# EAGLE board touch (EAGLE 7.3.0)
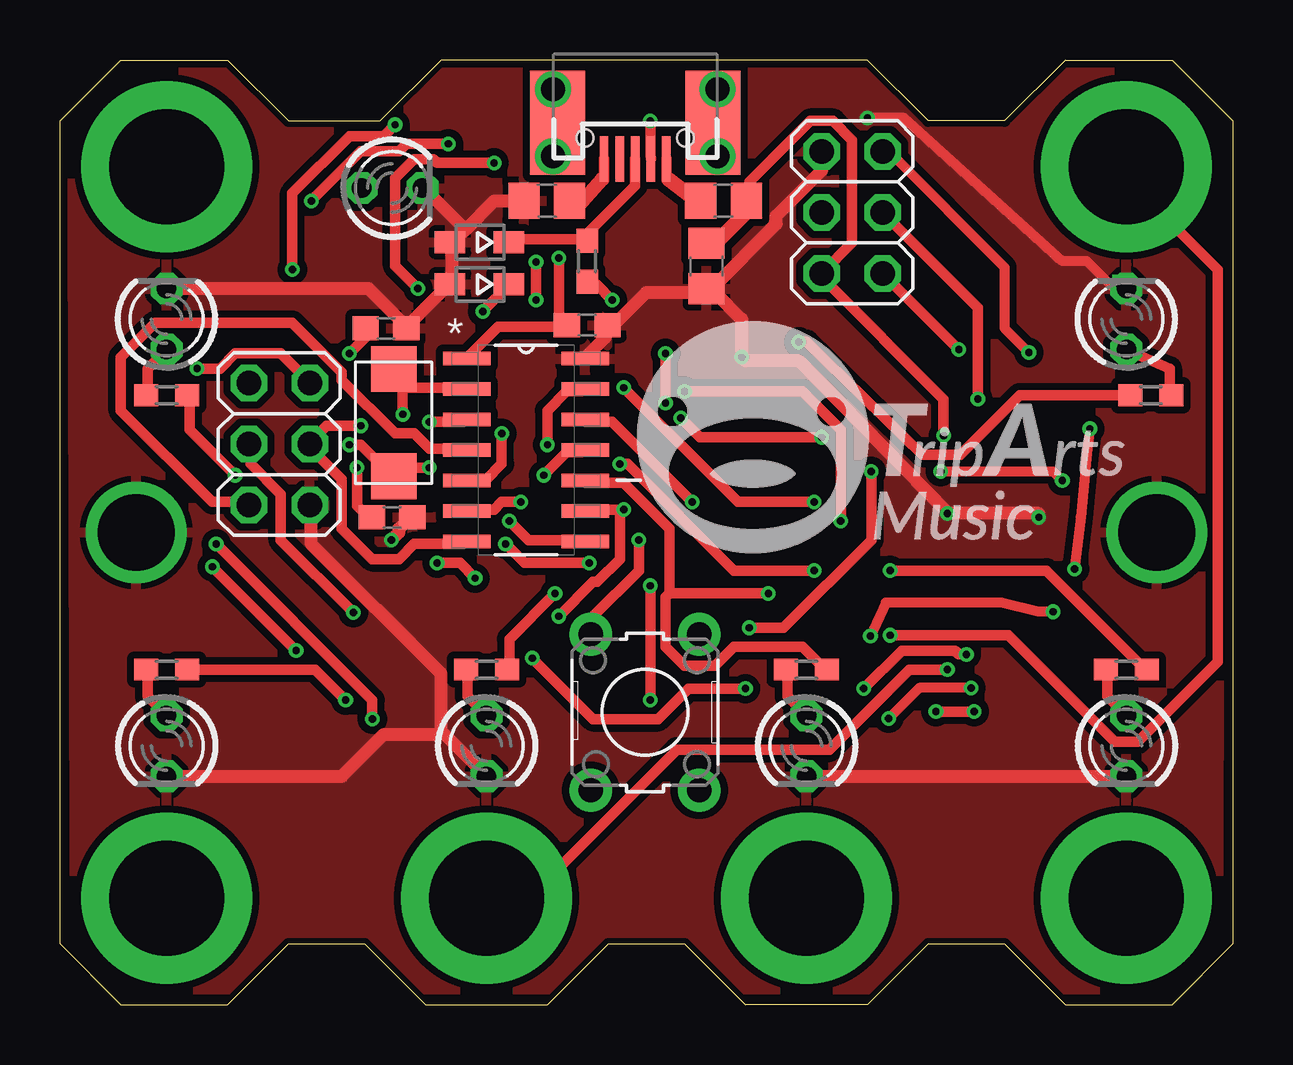
[diagram p0: board, top side]
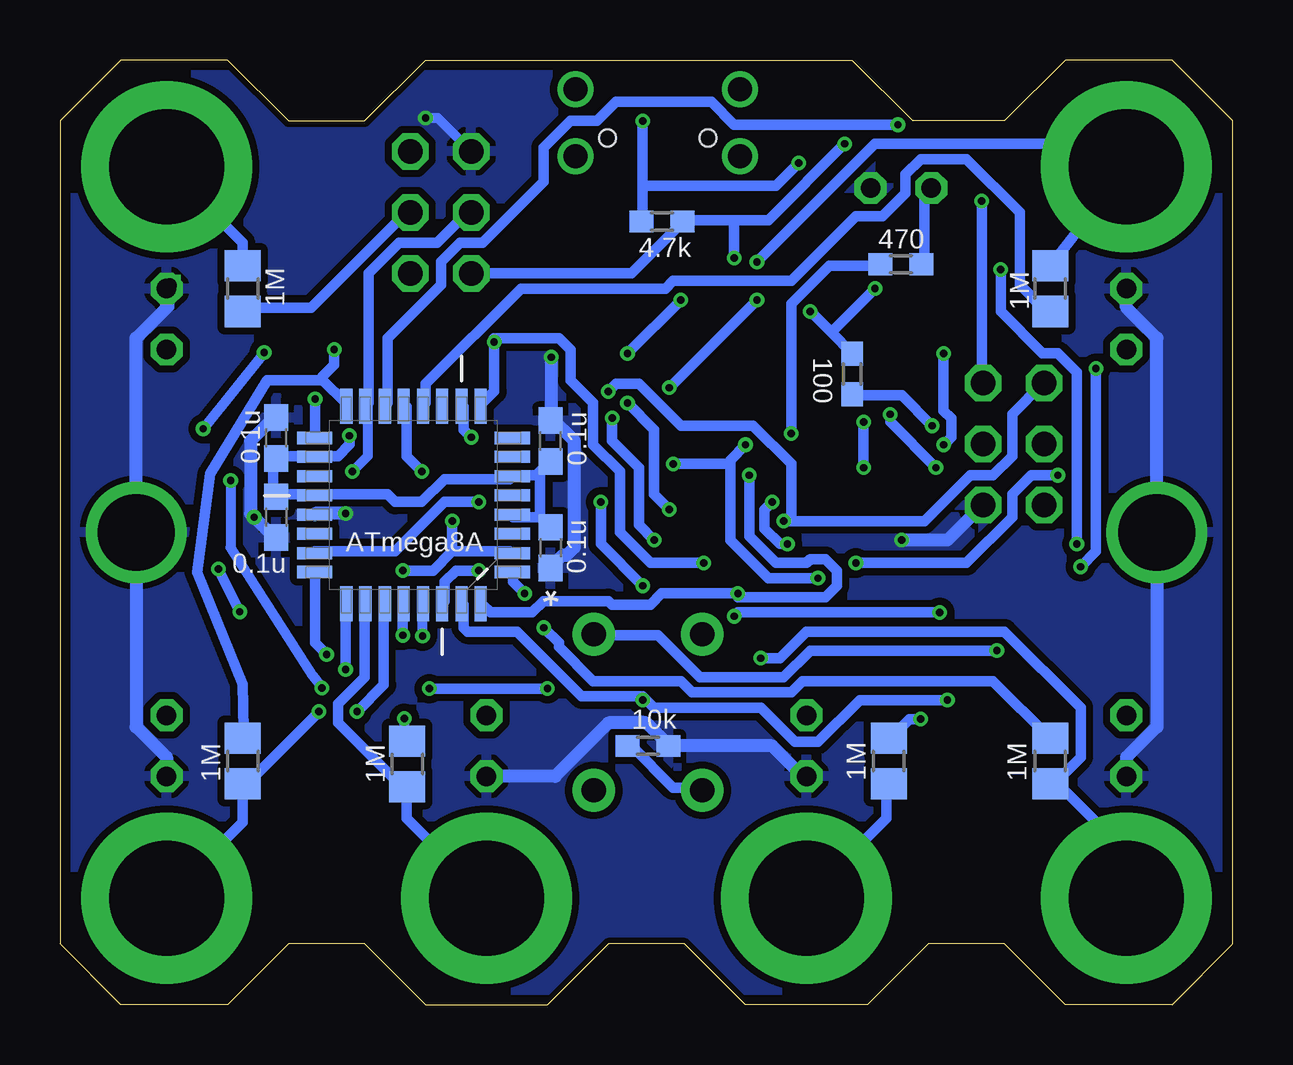
[diagram p1: board, bottom side, seen from below]

Size 48.9 x 39.37 mm. Coordinates in mm from the lower left corner, seen from the top.
Outline: 41.91,0 46.35,0 48.9,2.54 48.9,36.83 46.35,39.37 41.91,39.37 39.37,36.83 36.2,36.83 33.66,39.37 15.88,39.37 13.34,36.83 9.53,36.83 6.99,39.37 2.54,39.37 0,36.83 0,2.54 2.54,0 6.99,0 9.53,2.54 12.7,2.54 15.24,0 20.32,0 22.86,2.54 26.04,2.54 28.57,0 33.66,0 36.2,2.54 39.37,2.54 41.91,0
Copper layers (1*16): Top 0.035mm / dielectric 1.5mm / Bottom 0.035mm
Design rules "Elecrow_2-layer_eagle_rule": minimum track width 6mil, minimum drill 12mil, track to track 6mil, track to pad 6mil, pad to pad 6mil, via to via 6mil, smd to smd 0mil, copper to edge 10mil, drill to drill 10mil, minimum pad ring 10mil, minimum via ring 6mil, stop-mask expansion 2mil, vias tented up to drill 100mil, thermal gap 10mil
Net classes: 0 default: width 0.432 mm, clearance 0.305 mm; 1 power: width 0.533 mm, clearance 0.305 mm; 2 D+: width 0.381 mm, clearance 0.203 mm; 3 D-: width 0.381 mm, clearance 0.203 mm; 4 GND1: width 0.381 mm, clearance 0.203 mm; 5 VBUS: width 0.381 mm, clearance 0.203 mm

## Footprints (pad centres in the part's own frame; a part is rotated, then mirrored left to right if it is on the bottom)
C0603 = smd 1.1 x 1: 1 -0.85,0; 2 0.85,0
C0805 = smd 1.3 x 1.5: 1 -0.95,0; 2 0.95,0
2X03 = drill 1.016 octagon: 1 -2.54,-1.27; 2 -2.54,1.27; 3 0,-1.27; 4 0,1.27; 5 2.54,-1.27; 6 2.54,1.27
1X01 = drill 3.2 pad 3.81: 1 0,0
USB-MICROB = smd 0.35 x 1.9: D+ 0,2.904; D- -0.65,2.904; GND 1.3,2.904; ID 0.65,2.904; VBUS -1.3,2.904 | smd 2.286 x 4.318: MT1 3.239,1.397; MT3 -3.238,1.397 | drill 1: P$2 -3.429,2.794; P$4 -3.429,0; P$5 3.429,2.794; P$6 3.429,0 | hole 0.7: -2.095,2.032; 2.095,2.032
1X01-LARGE = drill 4.8 pad 7.112: 1 0,0
LED3MM = drill 0.813 octagon: A -1.27,0; K 1.27,0
MC-405 = smd 1.905 x 1.905: 1 0.305,1.575; 2 4.775,1.575
R0603 = smd 1 x 0.9: 1 -0.85,0; 2 0.85,0
R0805 = smd 1.3 x 1.5: 1 -0.95,0; 2 0.95,0
B3F-10XX = drill 1.016 pad 1.778: 1 -3.251,2.261; 2 3.251,2.261; 3 -3.251,-2.261; 4 3.251,-2.261
SOIC127P600X175-14N = smd 1.981 x 0.559: 1 -2.464,3.81; 2 -2.464,2.54; 3 -2.464,1.27; 4 -2.464,0; 5 -2.464,-1.27; 6 -2.464,-2.54; 7 -2.464,-3.81; 8 2.464,-3.81; 9 2.464,-2.54; 10 2.464,-1.27; 11 2.464,0; 12 2.464,1.27; 13 2.464,2.54; 14 2.464,3.81
QFP80P900X900X120-32N = smd 1.473 x 0.508: 1 -4.115,2.794; 2 -4.115,2.007; 3 -4.115,1.194; 4 -4.115,0.406; 5 -4.115,-0.406; 6 -4.115,-1.194; 7 -4.115,-2.007; 8 -4.115,-2.794; 17 4.115,-2.794; 18 4.115,-2.007; 19 4.115,-1.194; 20 4.115,-0.406; 21 4.115,0.406; 22 4.115,1.194; 23 4.115,2.007; 24 4.115,2.794 | smd 0.508 x 1.473: 9 -2.794,-4.115; 10 -2.007,-4.115; 11 -1.194,-4.115; 12 -0.406,-4.115; 13 0.406,-4.115; 14 1.194,-4.115; 15 2.007,-4.115; 16 2.794,-4.115; 25 2.794,4.115; 26 2.007,4.115; 27 1.194,4.115; 28 0.406,4.115; 29 -0.406,4.115; 30 -1.194,4.115; 31 -2.007,4.115; 32 -2.794,4.115
SOD323-W = smd 1.27 x 0.914: A 1.25,0; C -1.2,0

## Placement (x,y rotation side)
C1  0.1u  [C0603]  21.97,28.32 0 top
C2  22p  [C0603]  13.84,20.32 180 top
C3  22p  [C0603]  13.59,28.19 180 top
C4  22u  [C0805]  26.95,30.78 270 top
C5  0.1u  [C0603]  28.45,23.5 90 bottom
C6  0.1u  [C0603]  28.45,19.05 270 bottom
C7  0.1u  [C0603]  39.88,20.32 270 bottom
C8  0.1u  [C0603]  39.88,23.62 90 bottom
ID1  [C0805]  27.66,33.5 180 top
ID2  [C0805]  20.29,33.5 0 top
JP1  [2X03]  33.02,33.02 90 top
JP2  [2X03]  9.14,23.37 270 top
JP3  [1X01]  3.17,19.68 0 top
JP4  USB-MICROB  [USB-MICROB]  23.98,38.15 180 top
JP5  [1X01]  45.72,19.68 0 top
JP11  [1X01-LARGE]  4.45,34.92 180 top
JP12  [1X01-LARGE]  4.45,4.45 180 top
JP13  [1X01-LARGE]  17.78,4.45 180 top
JP14  [1X01-LARGE]  31.11,4.45 180 top
JP15  [1X01-LARGE]  44.45,4.45 180 top
JP16  [1X01-LARGE]  44.45,34.92 180 top
LED1  3m-red  [LED3MM]  13.84,34.04 0 top
LED2  [LED3MM]  4.45,28.57 90 top
LED3  [LED3MM]  4.45,10.79 270 top
LED4  [LED3MM]  17.78,10.79 270 top
LED5  [LED3MM]  31.11,10.79 270 top
LED6  [LED3MM]  44.45,10.79 270 top
LED7  [LED3MM]  44.45,28.57 90 top
Q1  MC-405  [MC-405]  15.49,21.72 90 top
R1  75  [R0603]  15.88,26.29 90 bottom
R2  75  [R0603]  21.97,30.99 90 top
R3  1.5k  [R0603]  23.8,32.64 0 bottom
R4  470  [R0603]  13.84,30.86 180 bottom
R5  [R0805]  7.62,29.84 270 bottom
R6  [R0805]  7.62,10.16 90 bottom
R7  [R0805]  14.35,10.16 90 bottom
R8  [R0805]  34.42,10.03 90 bottom
R9  [R0805]  41.27,10.16 90 bottom
R10  [R0805]  41.27,29.84 270 bottom
R11  470  [R0603]  4.45,25.4 0 top
R12  470  [R0603]  4.45,13.97 0 top
R13  470  [R0603]  17.78,13.97 0 top
R14  470  [R0603]  31.11,13.97 0 top
R15  470  [R0603]  44.45,13.97 0 top
R16  470  [R0603]  45.47,25.4 180 top
R17  75  [R0603]  24.38,10.79 180 bottom
S1  [B3F-10XX]  24.38,12.19 270 top
U2  ATTINY44-20SSU  [SOIC127P600X175-14N]  19.43,23.11 0 top
U3  ATMEGA8A-AU  [QFP80P900X900X120-32N]  34.16,20.83 180 bottom
U$1  LOGOSMALL  [LOGO-SMALL]  24.05,18.82 0 top
ZD1  3.6V  [SOD323-W]  17.5,31.78 180 top
ZD2  3.6V  [SOD323-W]  17.5,30.02 180 top

## Library data of the parts
C1-C8 ID1 ID2 JP3 JP5 JP11-JP16 R1-R17 U$1 ZD1 ZD2 = 0my
JP1 JP2 = pinhead
JP4 = 0my; PROD_ID: CONN-09505
LED1-LED7 = led
Q1 = 0my; OC_FARNELL: unknown; OC_NEWARK: unknown
S1 = 0my; MPN: B3F-1000; OC_FARNELL: 176432; OC_NEWARK: 36M3542
U2 = Atmel_By_element14_Batch_1-00; MPN: ATTINY44-20SSU; OC_FARNELL: 1455152; OC_NEWARK: 58M3787; PACKAGE: SOIC-14; SUPPLIER: Atmel
U3 = 0my; MPN: ATMEGA8A-AU; OC_FARNELL: 1748532; OC_NEWARK: 26R5638; PACKAGE: TQFP-32; SUPPLIER: Atmel

## Nets
+5V: C1.1 C4.1 C5.1 C6.1 C7.1 C8.1 ID1.1 JP1.2 JP2.2 R3.2 S1.1 U2.1 U3.4 U3.6 U3.18 U3.20
D+: JP4.D+ R2.2 ZD1.C
D-: JP4.D- R1.2 R3.1 ZD2.C
GND [power]: C1.2 C2.1 C3.1 C4.2 C5.2 C6.2 C7.2 C8.2 ID2.1 JP1.6 JP2.6 JP3.1 JP5.1 LED1.K LED2.K LED3.K LED4.K LED5.K LED6.K LED7.K R17.1 U2.14 U3.21 ZD1.A ZD2.A
GND1: ID2.2 JP4.GND
N$1: R5.2 U3.12
N$3: R4.2 U2.5
N$5: C2.2 Q1.2 U2.2
N$6: C3.2 Q1.1 U2.3
N$7: R11.2 U2.13 U3.30
N$8: LED1.A R4.1
N$9: R12.2 U2.12 U3.31
N$10: R14.2 U2.10 U3.1
N$11: JP11.1 R5.1 U3.23
N$12: JP2.5 U2.4
N$13: R13.2 U2.11 U3.32
N$14: JP2.4 R1.1 U2.7
N$15: R6.2 U3.13
N$17: R17.2 S1.4
N$19: R7.2 U3.14
N$20: JP1.4 R8.2 U3.15
N$21: JP1.5 U3.29
N$22: JP1.1 R9.2 U3.16
N$23: JP1.3 R10.2 U3.17
N$24: LED7.A R16.1
N$25: LED6.A R15.1
N$26: LED5.A R14.1
N$27: LED4.A R13.1
N$28: LED3.A R12.1
N$29: LED2.A R11.1
N$30: R16.2 U2.6 U3.9
N$31: JP12.1 R6.1 U3.24
N$32: JP13.1 R7.1 U3.25
N$33: JP14.1 R8.1 U3.26
N$34: JP15.1 R9.1 U3.27
N$35: JP16.1 R10.1 U3.28
N$36: S1.3 U3.10
N$37: JP2.3 R2.1 U2.9
N$39: JP2.1 R15.2 U2.8 U3.2
VBUS: ID1.2 JP4.VBUS

## Tracks (layer width: path | path; a pad name or v marks a point on that pad's centre or on a via)
+5V  (via drill 0.3)
  Top 0.432: U2.1 16.99,26.99 18.26,28.26 21.11,28.26 C1.1 20.8,28.42 v20.8,31.11 | 27.14,31.55 C4.1 | 28.89,33.29 ID1.1 28.73,33.66 28.73,34.29 31.27,36.83 32.23,36.83 33.02,36.04 33.02,31.75 JP1.2 31.75,30.32 36.83,25.24 v36.83,23.72 | v10.48,33.5 12.54,35.56 14.13,35.56 14.45,35.88 v16.19,35.88 | v6.35,18.26 v9.84,14.76 | v5.71,26.51 6.67,26.51 7.3,27.15 9.21,27.15 10.32,26.04 JP2.2
  Top 0.61: 28.89,33.29 27.14,31.55
  Bottom 0.432: 28.89,20.32 28.57,20 C6.1 | 28.89,20.32 30,20.32 U3.4 | 28.97,22.15 29.05,22.07 30,22.07 U3.6 30.16,21.91 32.86,21.91 33.81,20.95 34.92,20.95 35.24,21.27 38.1,21.27 U3.20 38.42,21.27 39.69,21.27 C7.1 40.01,21.27 40.01,22.7 C8.1 39.69,22.86 38.42,22.86 U3.18 38.1,22.86 37.31,22.86 36.83,23.37 v36.83,23.72 | 28.97,22.15 28.57,22.54 C5.1 | 28.89,20.32 28.89,22.07 28.97,22.15 | JP1.2 25.08,30.48 23.02,32.54 R3.2 22.86,32.7 20.8,32.7 | v10.48,33.5 10.48,26.04 JP2.2 | v16.19,35.88 19.37,32.7 20.8,32.7 | 20.8,32.7 v20.8,31.11 | v9.84,14.76 17.62,14.76 18.73,13.65 22.23,13.65 23.97,15.4 26.51,15.4 S1.1 | v6.35,18.26 5.71,18.89 v5.71,26.51
D+
  Top 0.432: ZD1.C 18.73,31.91 21.91,31.91 R2.2 21.91,32.07 23.97,34.13 JP4.D+
D-  (via drill 0.3)
  Top 0.432: v24.61,36.83 24.61,35.4 JP4.D- | v17.62,28.89 18.73,30 ZD2.C | v18.1,35.08 15.72,35.08 15.56,35.24 14.76,35.24 13.97,34.45 13.97,30.8 v14.92,29.84
  Bottom 0.432: v24.61,36.83 24.61,34.13 | 24.61,34.13 24.61,32.7 R3.1 | v17.62,28.89 16.75,28.02 | 16.75,28.02 R1.2 | 24.61,34.13 19.05,34.13 v18.1,35.08 | 16.75,28.02 v14.92,29.84
GND  (via drill 0.3, 0.6)
  Top 0.406: v44.32,29.97 43.81,29.97 42.8,30.99 41.78,30.99 35.18,36.96 v33.66,36.96
  Top 0.533: U2.14 21.91,26.99 22.7,27.78 22.7,28.26 C1.2 23.02,28.26 24.45,29.69 26.83,29.69 C4.2 | JP1.6 31.75,34.77 29.84,32.86 29.84,32.54 27.15,29.84 C4.2 | C4.2 27.3,29.69 28.42,28.57 v28.42,26.99 28.57,26.83 30.8,26.83 36.99,20.51 v36.99,20.48 40.8,20.48 v40.8,20.32 | v13.81,19.37 14.13,19.68 14.13,19.84 14.61,20.32 C2.1 | 15.88,11.43 15.88,13.81 10.48,19.21 10.48,20.8 JP2.6 | LED4.K 15.88,11.43 | 16.91,32.31 16.51,31.91 ZD1.A 16.35,31.75 16.35,30.16 ZD2.A 16.19,30 14.45,28.26 C3.1 14.29,28.42 12.86,29.84 LED2.K | 16.91,32.31 18.1,33.5 19.21,33.5 ID2.1 | 16.91,32.31 15.24,33.97 LED1.K | LED3.K 11.75,9.53 13.49,11.27 15.72,11.27 15.88,11.43 | LED5.K LED6.K
  Bottom 0.406: JP5.1 45.72,27.69 44.32,29.08 v44.32,29.97 | v33.66,36.96 33.15,36.96 JP1.6
  Bottom 0.533: C6.2 28.42,18.26 27.94,18.73 27.78,18.73 27.46,19.05 27.46,23.5 28.42,24.45 C5.2 28.42,24.61 v28.42,26.99 | C7.2 40.01,19.53 v40.8,20.32 40.96,20.48 40.96,23.5 40.01,24.45 C8.2 | v36.99,20.48 38.26,20.48 U3.21 | LED6.K 44.45,10.32 45.72,11.59 JP5.1 45.72,27.78 44.45,29.05 LED7.K | v13.81,19.37 11.91,19.37 10.48,20.8 JP2.6 | LED4.K 17.94,9.53 19.21,10.79 R17.1 23.65,10.95 24.45,11.75 26.04,11.75 28.26,9.53 LED5.K | LED3.K 4.45,10.32 3.17,11.59 JP3.1 3.17,27.78 4.45,29.05 LED2.K
  pour Bottom: 0.64,38.73 48.26,38.73 48.26,0.64 0.64,0.64
  pour Top: 0.51,38.86 48.39,38.86 48.26,0.64 0.64,0.64
GND1
  Top 0.432: 21.59,33.27 21.27,33.66 ID2.2 | 22.59,34.4 22.67,34.35 JP4.GND
  Top 0.61: 22.59,34.4 21.59,33.27
N$1
  Bottom 0.432: U3.12 33.66,25.08 33.66,25.88 29.69,29.84 23.65,29.84 23.34,30.16 18.41,30.16 15.72,32.86 14.61,32.86 13.65,33.81 13.65,34.61 13.02,35.24 11.11,35.24 8.89,33.02 8.89,30 7.94,29.05 7.62,29.05 R5.2
N$3  (via drill 0.3)
  Top 0.432: v18.41,23.81 18.41,22.54 17.78,21.91 16.99,21.91 U2.5
  Bottom 0.432: v18.41,23.81 18.41,29.21 16.83,30.8 14.76,30.8 R4.2
N$5  (via drill 0.3)
  Top 0.432: v12.38,22.38 12.38,20.8 12.86,20.32 C2.2 | v14.29,24.61 14.29,26.04 13.97,26.35 Q1.2 14.45,25.72 16.83,25.72 U2.2
  Bottom 0.432: v12.38,22.38 14.29,24.29 v14.29,24.61
N$6  (via drill 0.3)
  Top 0.432: v12.06,27.15 12.7,27.78 12.7,28.1 C3.2 | v12.06,23.34 12.54,23.34 13.81,22.07 Q1.1 14.13,22.07 14.45,22.38 v15.4,22.38 | v15.4,24.29 16.83,24.29 U2.3
  Bottom 0.432: v12.06,27.15 12.06,24.77 11.75,24.45 11.75,23.65 v12.06,23.34 | v15.4,22.38 v15.4,24.29
N$7  (via drill 0.3)
  Top 0.432: v7.3,22.07 5.4,23.97 5.4,25.4 R11.2 | v15.72,18.41 16.67,18.41 v17.3,17.78 | v20.32,23.34 20.32,24.77 21.11,25.56 21.75,25.56 U2.13 | v31.43,18.1 28.1,18.1 23.65,22.54 v23.34,22.54
  Bottom 0.432: v7.3,22.07 8.41,22.07 9.21,21.27 9.21,20.32 11.11,18.41 v15.72,18.41 | v17.3,17.78 19.37,17.78 20.95,19.37 20.95,22.54 | 20.95,22.54 20.95,22.7 v20.32,23.34 | v31.43,18.1 32.38,18.1 32.86,17.62 32.86,16.83 U3.30 | 20.95,22.54 v23.34,22.54
N$8
  Bottom 0.432: R4.1 12.86,30.96 12.86,33.81 12.7,33.97 LED1.A
N$9  (via drill 0.3)
  Top 0.432: R12.2 10.64,13.97 v11.91,12.7 | v26.35,20.95 23.02,24.29 21.91,24.29 U2.12 | v24.61,12.7 v24.61,17.46
  Bottom 0.432: v11.91,12.7 15.56,12.7 17.3,10.95 18.26,10.95 19.68,12.38 24.13,12.38 24.53,12.78 | 24.53,12.78 24.61,12.86 27.15,12.86 29.84,15.56 31.91,15.56 32.07,15.72 32.07,16.67 U3.31 | v26.35,20.95 26.35,19.21 v24.61,17.46 | v24.61,12.7 24.53,12.78
N$10  (via drill 0.3)
  Top 0.432: 25.4,17.14 25.24,16.99 25.24,14.92 26.04,14.13 27.3,14.13 28.1,14.92 30.96,14.92 31.91,13.97 R14.2 | 25.4,17.14 25.4,19.84 23.5,21.75 21.91,21.75 U2.10 | 25.4,17.14 v29.53,17.14
  Bottom 0.432: v29.53,17.14 30,17.62 30,17.94 U3.1
N$11  (via drill 0.3)
  Top 0.432: v31.43,20.95 28.26,20.95 v23.5,25.72 | v19.84,30.96 v19.84,29.37
  Bottom 0.432: v31.43,20.95 32.86,20.95 34.92,18.89 38.26,18.89 U3.23 | v19.84,29.37 v23.5,25.72 | v19.84,30.96 14.92,35.88 5.4,35.88 JP11.1 5.94,32.92 R5.1
N$12
  Top 0.432: U2.4 16.83,23.18 15.4,23.18 14.76,23.81 13.97,23.81 11.75,26.04 11.75,26.35 9.68,28.42 3.97,28.42 2.54,26.99 2.54,24.77 6.35,20.95 7.78,20.95 JP2.5
N$13  (via drill 0.3)
  Top 0.432: v20.64,17.14 18.73,15.24 18.73,13.97 R13.2 | v20.16,22.07 21.11,23.02 21.75,23.02 U2.11
  Bottom 0.432: U3.32 31.27,16.67 30.96,16.35 29.21,16.35 28.73,16.83 26.04,16.83 25.88,16.67 24.29,16.67 23.81,17.14 v20.64,17.14 20.64,16.99 16.99,16.99 16.51,17.46 16.51,18.1 16.99,18.57 17.62,18.57 17.78,18.41 19.05,18.41 20.16,19.53 v20.16,22.07
N$14  (via drill 0.3)
  Top 0.432: v12.54,24.13 11.11,24.13 10.48,23.5 JP2.4 10.48,23.18 11.75,21.91 11.75,19.84 13.02,18.57 14.13,18.57 14.76,19.21 16.83,19.21 U2.7
  Bottom 0.432: v12.54,24.13 13.81,25.4 15.88,25.4 R1.1
N$15  (via drill 0.3)
  Top 0.432: v33.81,22.23 33.81,19.37 30.16,15.72 v28.73,15.72
  Bottom 0.432: v33.81,22.23 34.45,22.86 34.45,24.92 U3.13 | v28.73,15.72 28.1,15.08 28.1,14.92 26.67,13.49 23.02,13.49 22.54,13.02 18.41,13.02 17.94,13.49 10,13.49 R6.2
N$17
  Bottom 0.432: R17.2 25.08,10.79 23.34,9.05 22.23,9.05 S1.4
N$19  (via drill 0.3)
  Top 0.432: v13.97,36.67 13.49,36.2 12.06,36.2 9.68,33.81 v9.68,30.64 | v6.51,19.21 13.02,12.7 v13.02,11.91
  Bottom 0.432: v13.97,36.67 20.8,36.67 21.75,37.62 25.72,37.62 26.51,36.83 27.62,36.83 28.73,35.72 28.73,34.29 31.27,31.75 32.23,31.75 33.02,30.96 33.02,30 35.24,27.78 35.24,25.08 U3.14 | v9.68,30.64 9.68,28.89 7.94,27.15 7.3,27.15 6.51,26.35 v6.51,19.21 | v13.02,11.91 13.49,11.91 14.29,11.11 R7.2
N$20  (via drill 0.3)
  Top 0.406: v36.7,22.23 41.4,22.23 v41.78,21.84 | v37.97,13.21 35.81,13.21 v34.54,11.94
  Bottom 0.406: U3.15 36.07,24.94 36.07,22.86 v36.7,22.23 | v41.78,21.84 41.78,19.05 38.35,13.72 v37.97,13.21 | v34.54,11.94 34.54,11.36 R8.2
  Bottom 0.432: JP1.4 31.91,33.02 33.18,31.75 34.77,31.75 36.04,30.48 36.04,25.08 U3.15
N$21  (via drill 0.3)
  Top 0.406: JP1.5 34.54,35.56 39.37,30.73 39.37,28.19 v40.39,27.18 | v42.93,24 42.8,22.99 42.55,20.32 v42.29,18.16 | v41.4,16.38 40.77,16.38 39.24,16.76 34.42,16.76 v33.78,15.37
  Bottom 0.406: v40.39,27.18 v42.93,24 | v42.29,18.16 v41.4,16.38 | v33.78,15.37 33.78,16.61 U3.29
N$22  (via drill 0.3)
  Top 0.432: v37.47,27.3 JP1.1
  Bottom 0.432: 37.94,26.04 36.99,25.08 U3.16 | 37.94,26.04 40.26,26.04 42.64,22.13 43.18,18.03 41.27,13.37 41.24,11.46 R9.2 | v37.47,27.3 37.47,26.67 37.94,26.19 37.94,26.04
N$23  (via drill 0.3)
  Top 0.432: v38.26,25.24 38.26,29.05 JP1.3
  Bottom 0.432: v38.26,25.24 38.26,23.65 U3.17 | JP1.3 34.45,33.02 38.42,29.05 41.27,29.05 R10.2
N$24
  Top 0.432: LED7.A 46.26,26.51 46.26,25.4 R16.1
N$25
  Top 0.432: LED6.A 43.66,12.86 43.66,13.97 R15.1
N$26
  Top 0.432: LED5.A 30.32,12.86 30.32,13.97 R14.1
N$27
  Top 0.432: LED4.A 16.99,12.86 16.99,13.97 R13.1
N$28
  Top 0.432: LED3.A 3.65,12.86 3.65,13.97 R12.1
N$29
  Top 0.432: LED2.A 3.65,26.51 3.65,25.4 R11.1
N$30  (via drill 0.3)
  Top 0.432: R16.2 40.01,25.4 37.53,22.92 35.94,22.92 31.11,27.62 v30.8,27.62 | v19.21,20.95 18.41,20.95 18.1,20.64 16.99,20.64 U2.6 | v18.57,19.21 19.37,18.41 v22.07,18.41
  Bottom 0.432: U3.9 31.27,25.08 30.8,25.56 v30.8,27.62 30.8,27.78 28.1,27.78 27.62,27.3 27.62,26.04 26.67,25.08 26.67,23.34 25.56,22.23 25.56,19.68 24.29,18.41 v22.07,18.41 | v19.21,20.95 19.53,20.64 19.53,19.84 18.89,19.21 v18.57,19.21
N$31  (via drill 0.3)
  Top 0.432: v37.78,14.61 37.47,14.61 37.31,14.76 35.08,14.76 v33.5,13.18 | v28.57,13.18 26.19,13.18 24.92,11.91 22.23,11.91 v19.68,14.45
  Bottom 0.432: v37.78,14.61 38.26,15.08 38.26,17.94 U3.24 | v28.57,13.18 v33.5,13.18 | v19.68,14.45 18.89,14.45 17.78,15.56 9.53,15.56 6.35,12.38 6.35,10.32 7.3,9.37 7.62,9.37 R6.1 7.3,9.21 4.45,6.35 JP12.1
N$32  (via drill 0.3)
  Top 0.432: v36.99,13.97 35.4,13.97 32.07,10.64 25.72,10.64 19.53,4.45 JP13.1
  Bottom 0.432: v36.99,13.97 36.99,16.67 U3.25 | JP13.1 14.45,7.78 14.45,9.21 R7.1
N$33
  Bottom 0.432: U3.26 36.2,16.67 36.2,13.65 37.31,12.54 37.31,11.75 34.77,9.21 34.45,9.21 R8.1 34.45,8.89 34.45,7.78 JP14.1
N$34  (via drill 0.3)
  Top 0.432: v38.1,12.22 v36.51,12.22
  Bottom 0.432: v36.51,12.22 35.4,13.34 35.4,16.67 U3.27 | v38.1,12.22 40.96,9.37 41.27,9.37 R9.1 41.27,7.62 JP15.1
N$35  (via drill 0.3)
  Top 0.432: v34.61,15.4 39.53,15.4 43.97,10.95 44.93,10.95 48.26,14.29 48.26,30.64 44.45,34.45 JP16.1
  Bottom 0.432: v34.61,15.4 34.61,16.67 U3.28 | R10.1 41.27,31.75 JP16.1
N$36  (via drill 0.3)
  Top 0.432: v31.75,23.65 26.67,23.65 v25.88,24.45 | v24.13,19.37 24.13,18.1 22.23,16.19 22.23,15.56 S1.3
  Bottom 0.432: v31.75,23.65 32.07,23.97 32.07,24.92 U3.10 | v25.88,24.45 25.88,23.5 24.77,22.38 24.77,20 v24.13,19.37
N$37  (via drill 0.3)
  Top 0.432: v23.02,29.37 22.38,30 22.07,30 R2.1 | v25.24,25.08 v25.24,27.15 | U2.9 21.91,20.64 v23.5,20.64 23.34,20.48 23.34,18.57 22.38,17.62 22.23,17.62 v20.8,16.19 | v12.22,16.35 9.21,19.37 9.21,21.27 7.94,22.54 7.94,23.34 JP2.3
  Bottom 0.432: v25.24,27.15 v23.02,29.37 | v25.24,25.08 24.13,23.97 24.13,21.27 v23.5,20.64 | v12.22,16.35 20.64,16.35 v20.8,16.19
N$39  (via drill 0.3)
  Top 0.432: v34.61,18.1 41.12,18.1 45.24,13.97 R15.2 | v18.73,20.16 19.53,19.37 21.75,19.37 U2.8 | v32.54,20.16 32.54,23.97 30.96,25.56 v26.04,25.56
  Bottom 0.432: v34.61,18.1 33.34,18.1 32.54,18.89 | 32.54,18.89 30.16,18.89 U3.2 | 18.41,20.16 12.86,20.16 10.95,22.07 10,22.07 9.21,22.86 9.21,24.61 7.94,25.88 JP2.1 | 18.41,20.16 v18.73,20.16 | v32.54,20.16 32.54,18.89 | v26.04,25.56 25.72,25.88 24.77,25.88 23.02,24.13 20,24.13 18.41,22.54 18.41,20.16
VBUS
  Top 0.432: 26.35,33.66 26.67,33.66 ID1.2 | 25.38,34.4 25.27,34.4 JP4.VBUS
  Top 0.61: 25.38,34.4 26.35,33.66

## Text on the board
_tNames: mega8 | ID2 | ID1 | 3.6V | 100 | 22u | 22p | 1 | 1 | 0.1u | + | + | 1k | 1k | 16Mhz | Tiny44 | GND | GND | Ttiny44 | 22p | mi:muz:tuch#1 v0.11 | (CC)2016 D.F.Mac. | 1k | 1k | 1k | 1k | + | + | + | +
_bNames: 470 | 4.7k | 1M | 1M | 100 | 0.1u | 0.1u | 0.1u | ATmega8A | 0.1u | 10k | 1M | 1M | 1M | 1M